# Altium PCB BigBed.PcbDoc
Units mm, origin at the board's own origin, x right, y up, seen from the top; angles counter-clockwise.
Board outline 250 x 270 mm, 2 copper layers (Top Layer, Bottom Layer), stack 1.771 mm thick; 9 components, 6 nets, 29 pads, 314 vias.
Unrouted connection lines stored in the file: 1.
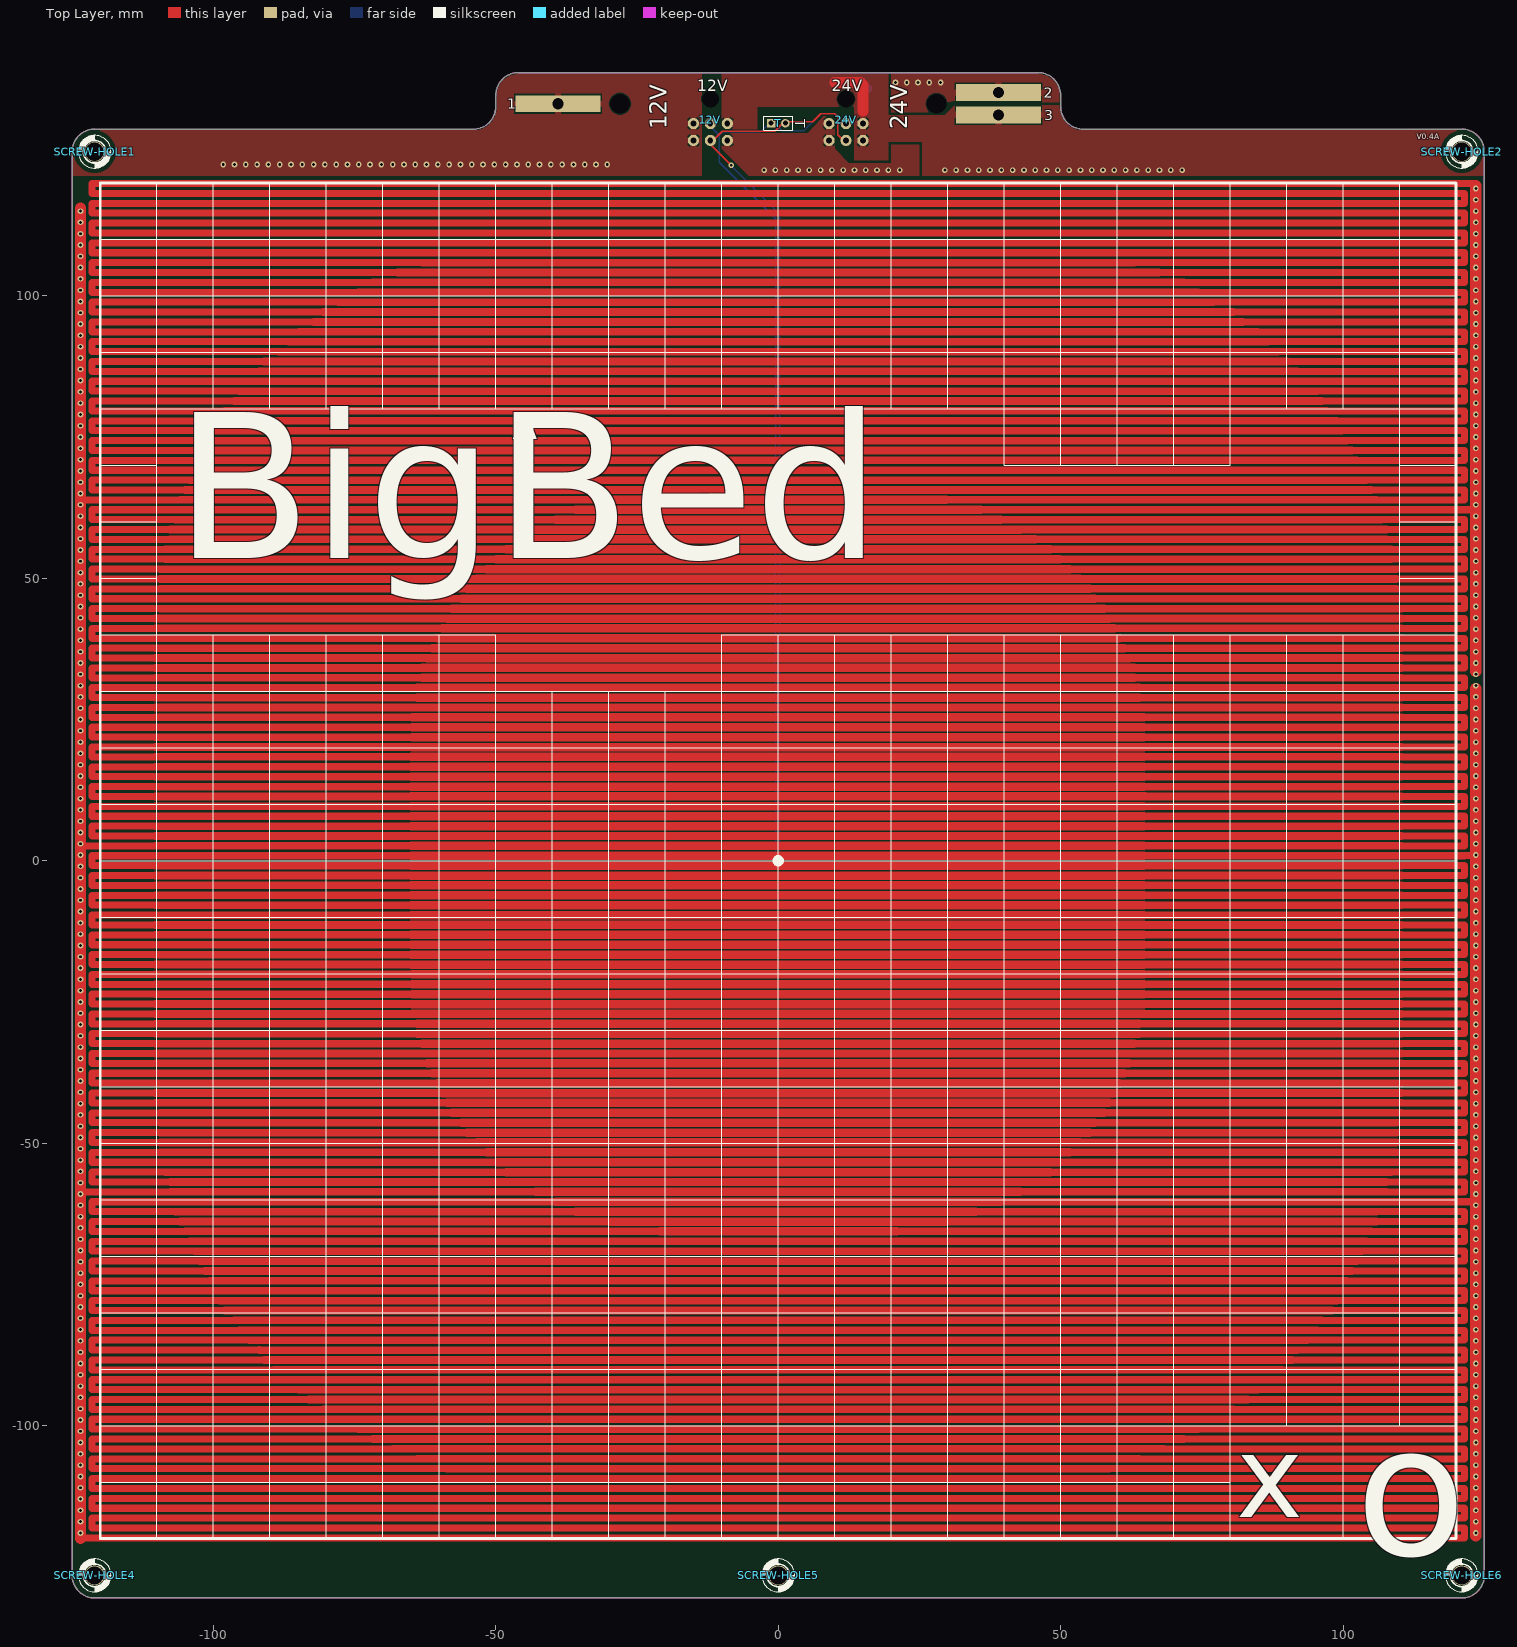
[diagram p0: Top Layer view]
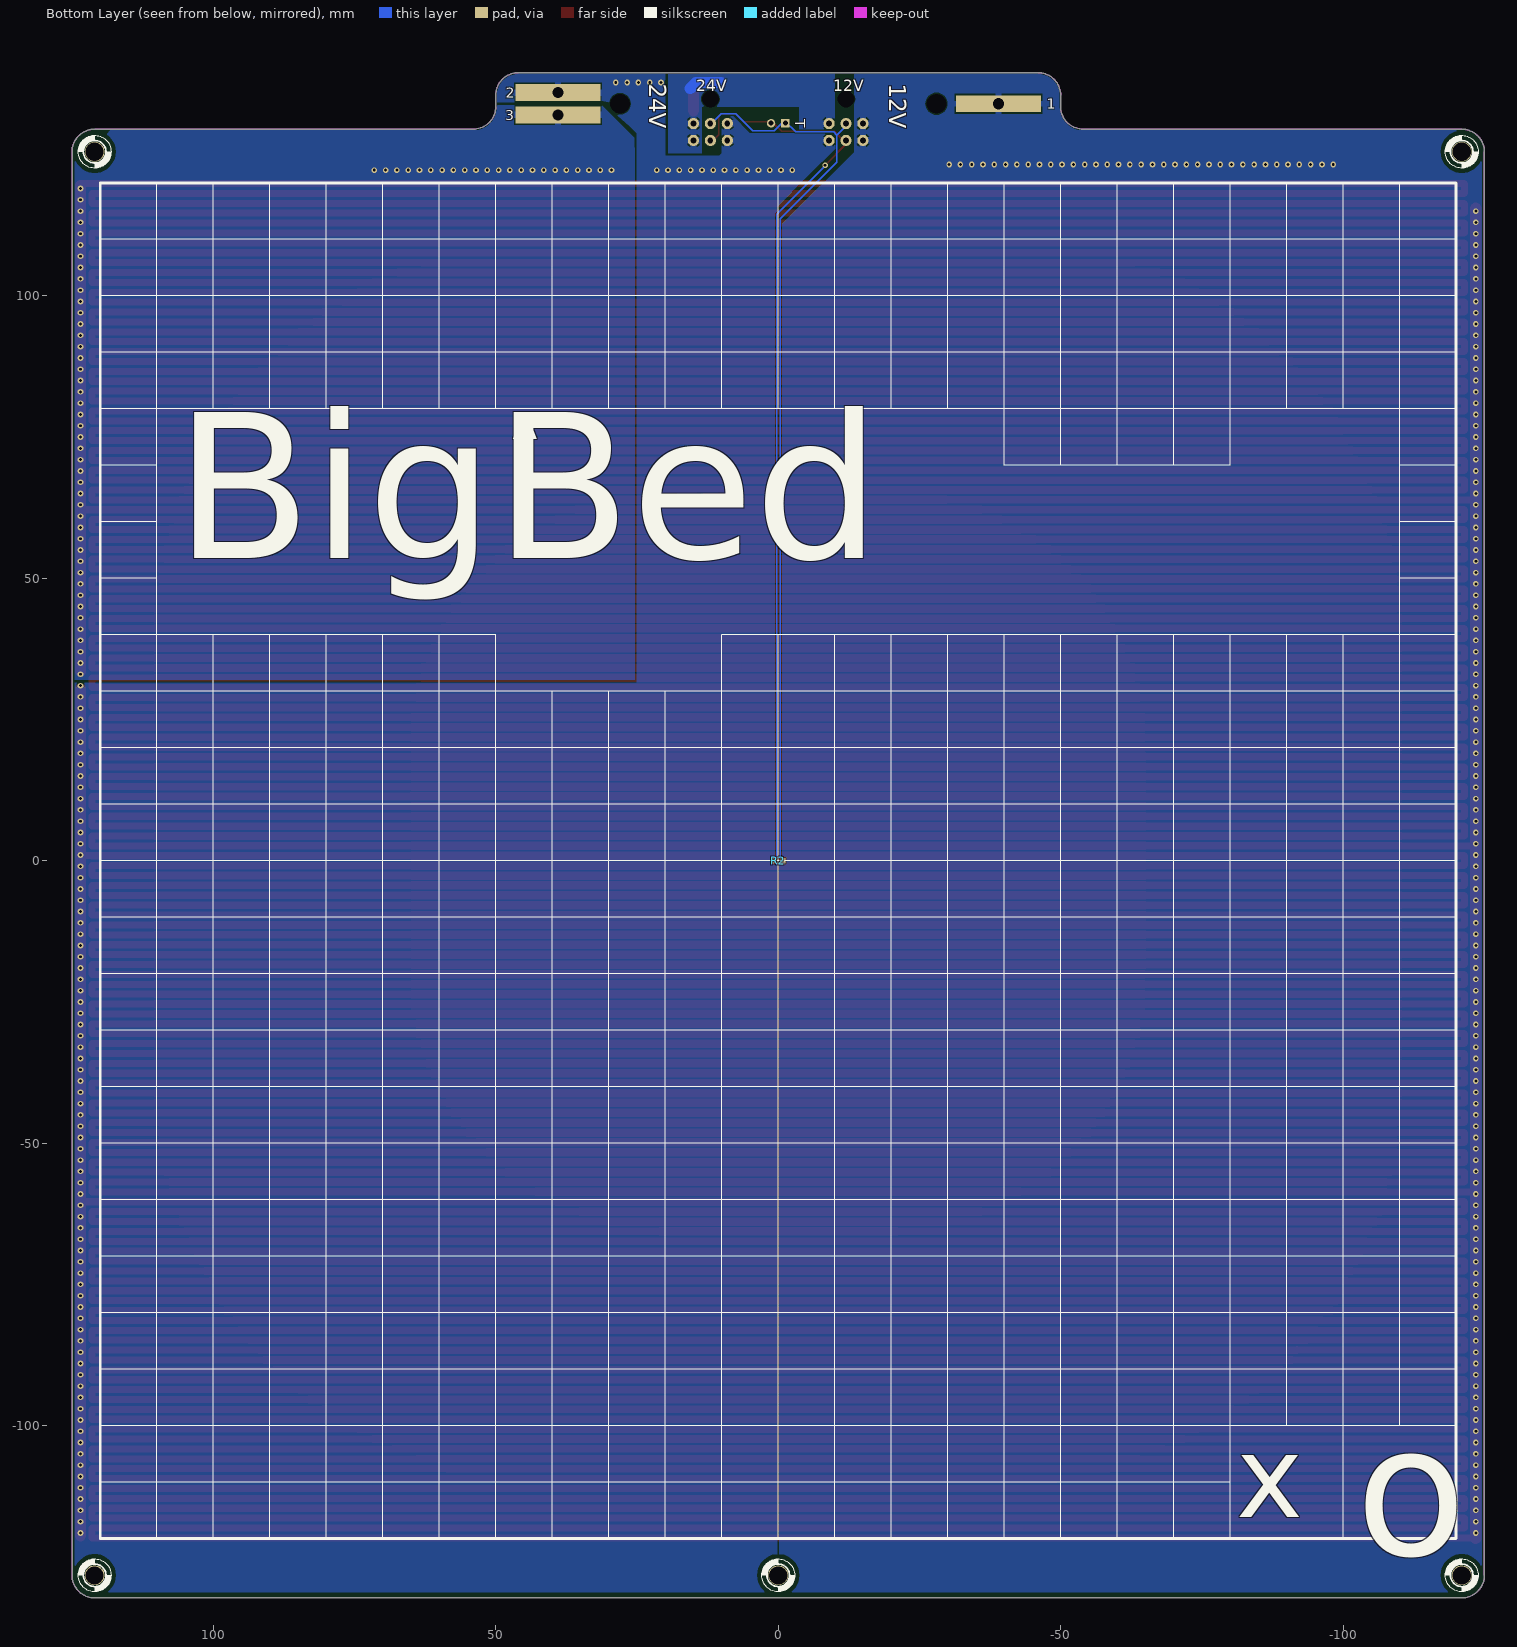
[diagram p1: Bottom Layer view, seen from below]

## Layer stack, top to bottom
Top Solder: solder mask 0.0102, Solder Resist, Dk 3.5
Top Layer: signal copper 0.0356
Dielectric1: dielectric 1.7, FR-4, Dk 4.8
Bottom Layer: signal copper 0.0356
Bottom Solder: solder mask 0.0102, Solder Resist, Dk 3.5

## Board outline
-125,-126.5 ccw(c-121,-126.5) -121,-130.5 121,-130.5 ccw(c121,-126.5) 125,-126.5 125,125.5 ccw(c121,125.5) 121,129.5 54,129.5 cw(c54,133.5) 50,133.5 50,135.5 ccw(c46,135.5) 46,139.5 -46,139.5 ccw(c-46,135.5) -50,135.5 -50,133.5 cw(c-54,133.5) -54,129.5 -121,129.5 ccw(c-121,125.5) -125,125.5

## Design rules (kind name [scope] priority, off if disabled: settings)
Clearance [All] p1: gap=0.2 except(0.4: Poly-Poly)
FabricationTestPointUsage TestPointUsage [All] p1: valid=0 allowmultiple=FALSE
FabricationTestpoint Testpoint [All] p1: side=3 testpointundercomponent=TRUE minsize=1.016 maxsize=2.54 preferedsize=1.524 minholesize=0 maxholesize=1.016 preferedholesize=0.813 testpointgrid=0.025 allowsidetop=TRUE allowsidebottom=TRUE usegrid=TRUE gridtolerance=0
PolygonConnect [All] p1: connectstyle=Relief reliefconductorwidth=1.1 reliefentries=4 polygonreliefangle="90 Angle" airgapwidth=0.25
RoutingVias [All] p1: holewidth=0.711 width=1.27 viastyle="Through Hole" minholewidth=0.711 minwidth=1.27 maxholewidth=0.711 maxwidth=1.27
SilkToSolderMaskClearance SilkscreenOverComponentPads [IsPad] p1: minsilkscreentomaskgap=0.254 clearancetoexposedcopper=TRUE
SolderMaskExpansion [All] p1: expansion=0.102
Width [All] p1: maxlimit=5 minlimit=0.2 preferedwidth=2
27 further rules are at their usual default settings.

## Components (designator, comment, footprint, x,y, rotation, side; value= is the part's Value field where it differs from the comment)
12V "Header 6" "Molex Micro-Fit 6" -12,130.5 r180 top
24V "Header 6" "Molex Micro-Fit 6" 12,130.5 r180 top
R2 "RES_EMPTY_0603" RESC1608X55N 0,0 r0 bottom
SCREW-HOLE1 "Screw Hole" M3-HOLE-2 -121,125.5 r90 top
SCREW-HOLE2 "Screw Hole" M3-HOLE-2 121,125.5 r90 top
SCREW-HOLE4 "Screw Hole" M3-HOLE-2 -121,-126.5 r90 top
SCREW-HOLE5 "Screw Hole" M3-HOLE-2 0,-126.5 r90 top
SCREW-HOLE6 "Screw Hole" M3-HOLE-2 121,-126.5 r90 top
T "Header 2" HDR1X2 -1.27,130.56 r0 top (schematic designator P1)

## Footprints (in the part's own frame and the unit in brackets; to place one, negate y for a bottom-side part, rotate by r counter-clockwise, add the part's x,y. Pads: shape width x height; smd on the part's side, far side on the other; paste and mask are expansions set on the pad)
HDR1X2 [mm] "Connector; Header; 2 Position"
  rect 1.5x1.5 hole 0.9: 1(0,0)
  round 1.5 hole 0.9: 2(2.54,0)
  silkscreen extent -1.27,-1.27 3.81,1.27
M3-HOLE-2 [mm]
  round 3.5 hole 3.2: M3(0,0)
  silkscreen extent -2.9,-2.93 2.9,2.93
"Molex Micro-Fit 6" [mm]
  round 2 hole 1: 1(3,0) 2(0,0) 3(-3,0) 4(3,3) 5(0,3) 6(-3,3)
  round 2 hole 3: 7(0,-4.32)
  body extent -6.57,-8.85 6.58,3.39, height 8.83
RESC1608X55N [mm] "Chip Resistor, Body 1.6x0.8mm, EIA 0603, IPC Medium Density"
  round 0.254 on Mech15: 0(0,0)
  rrect25% 0.9x1 smd: 1(-0.85,0) 2(0.85,0)
  Top Layer pour cut-out: -0.6,0.5 -0.4,0.7 0.4,0.7 0.6,0.5 0.6,-0.5 0.4,-0.7 -0.4,-0.7 -0.6,-0.5
  silkscreen extent -0.15,-0.41 0.15,0.41, body extent -0.87,-0.47 0.88,0.48, height 0.54

## Part data
12V 24V: "Header, 6-Pin"
R2: "Resistor, 08603 SMD, Empty footprint"
T: "Header, 2-Pin"

## Free pads (board coordinates)
  rect 15x3 hole 2: 4(-39,134) 5(39,136) 6(39,132)
  round 1 hole 3.5: 7(28,134) 9(-28,134)

## Via types
v1: diameter 1, hole 0.5, Top Layer to Bottom Layer, tented both sides, 314 vias

## Nets (pads, with @x,y where several pads share a name; then routed paths per layer and width w, separated by ;. In a path a pad name is that pad's centre, name@x,y a point inside that pad or via, vN(x,y) a via of type N, cw(c..) or ccw(c..) an arc to the next point about the centre after c; other vN are vias at no path point)
GND: 12V.3 12V.6 24V.1 24V.3 24V.4 24V.6 pad.5 pad.6 | length 251.5
  Top Layer w2: 10.115,137.75 14.5,137.75 15,137.25 15,132.75 ; v1@123.5,-119.5 v1@123.5,30.5 ; 123.5,33.5 123.5,119.5
  Bottom Layer w2: 10.115,137.75 14.5,137.75 15.56,136.69
  other v1: 123.5,-119 123.5,-117 123.5,-115 123.5,-113 123.5,-111 123.5,-109 123.5,-107 123.5,-105 123.5,-103 123.5,-101 123.5,-99 123.5,-97 123.5,-95 123.5,-93 123.5,-91 123.5,-89 123.5,-87 123.5,-85 123.5,-83 123.5,-81 123.5,-79 123.5,-77 123.5,-75 123.5,-73 123.5,-71 123.5,-69 123.5,-67 123.5,-65 123.5,-63 123.5,-61 123.5,-59 123.5,-57 123.5,-55 123.5,-53 123.5,-51 123.5,-49 123.5,-47 123.5,-45 123.5,-43 123.5,-41 123.5,-39 123.5,-37 123.5,-35 123.5,-33 123.5,-31 123.5,-29 123.5,-27 123.5,-25 123.5,-23 123.5,-21 123.5,-19 123.5,-17 123.5,-15 123.5,-13 123.5,-11 123.5,-9 123.5,-7 123.5,-5 123.5,-3 123.5,-1 123.5,1 123.5,3 123.5,5 123.5,7 123.5,9 123.5,11 123.5,13 123.5,15 123.5,17 123.5,19 123.5,21 123.5,23 123.5,25 123.5,27 123.5,29 123.5,31 123.5,33 123.5,35 123.5,37 123.5,39 123.5,41 123.5,43 123.5,45 123.5,47 123.5,49 123.5,51 123.5,53 123.5,55 123.5,57 123.5,59 123.5,61 123.5,63 123.5,65 123.5,67 123.5,69 123.5,71 123.5,73 123.5,75 123.5,77 123.5,79 123.5,81 123.5,83 123.5,85 123.5,87 123.5,89 123.5,91 123.5,93 123.5,95 123.5,97 123.5,99 123.5,101 123.5,103 123.5,105 123.5,107 123.5,109 123.5,111 123.5,113 123.5,115 123.5,117 123.5,119 -2.5,122.25 -0.5,122.25 1.5,122.25 3.5,122.25 5.5,122.25 7.5,122.25 9.5,122.25 11.5,122.25 13.5,122.25 15.5,122.25 17.5,122.25 19.5,122.25 21.5,122.25 29.5,122.25 31.5,122.25 33.5,122.25 35.5,122.25 37.5,122.25 39.5,122.25 41.5,122.25 43.5,122.25 45.5,122.25 47.5,122.25 49.5,122.25 51.5,122.25 53.5,122.25 55.5,122.25 57.5,122.25 59.5,122.25 61.5,122.25 63.5,122.25 65.5,122.25 67.5,122.25 69.5,122.25 71.5,122.25 20.75,137.75 22.75,137.75 24.75,137.75 26.75,137.75 28.75,137.75
NetD1_A: 
NetD1_K: 
T1: 12V.2 24V.2 R2.1 T.1 | length 161.4
  Bottom Layer w0.25: 12V.2@-12,130 -10.4,128.4 ; R2.1 -0.85,0.15 -0.4,0.6 -0.4,113.65 -10.4,123.65 -10.4,128.4 ; 24V.2@12,130 12,130.3 10.05,132.25 7.55,132.25 4.5,129.2 0.7,129.2 -0.91,130.81 -1.27,130.81 -3.08,129 -9.8,129 -10.4,128.4
T2: 12V.5 24V.5 R2.2 T.2 | length 162.6
  Top Layer w0.25: v1(-8.3,123.1) -12,126.8 -12,127 -9.9,129.1 -0.6,129.1 1.11,130.81 6.11,130.81 7.55,132.25 10.05,132.25 10.5,131.8 10.5,128.5 24V.5@12,127
  Bottom Layer w0.25: v1@-8.35,123.05 0.3,114.4 0.3,0.6 0.85,0.05 R2.2
VCC: 12V.1 12V.4 pad.4
  other v1: -123.5,-119 -123.5,-117 -123.5,-115 -123.5,-113 -123.5,-111 -123.5,-109 -123.5,-107 -123.5,-105 -123.5,-103 -123.5,-101 -123.5,-99 -123.5,-97 -123.5,-95 -123.5,-93 -123.5,-91 -123.5,-89 -123.5,-87 -123.5,-85 -123.5,-83 -123.5,-81 -123.5,-79 -123.5,-77 -123.5,-75 -123.5,-73 -123.5,-71 -123.5,-69 -123.5,-67 -123.5,-65 -123.5,-63 -123.5,-61 -123.5,-59 -123.5,-57 -123.5,-55 -123.5,-53 -123.5,-51 -123.5,-49 -123.5,-47 -123.5,-45 -123.5,-43 -123.5,-41 -123.5,-39 -123.5,-37 -123.5,-35 -123.5,-33 -123.5,-31 -123.5,-29 -123.5,-27 -123.5,-25 -123.5,-23 -123.5,-21 -123.5,-19 -123.5,-17 -123.5,-15 -123.5,-13 -123.5,-11 -123.5,-9 -123.5,-7 -123.5,-5 -123.5,-3 -123.5,-1 -123.5,1 -123.5,3 -123.5,5 -123.5,7 -123.5,9 -123.5,11 -123.5,13 -123.5,15 -123.5,17 -123.5,19 -123.5,21 -123.5,23 -123.5,25 -123.5,27 -123.5,29 -123.5,31 -123.5,33 -123.5,35 -123.5,37 -123.5,39 -123.5,41 -123.5,43 -123.5,45 -123.5,47 -123.5,49 -123.5,51 -123.5,53 -123.5,55 -123.5,57 -123.5,59 -123.5,61 -123.5,63 -123.5,65 -123.5,67 -123.5,69 -123.5,71 -123.5,73 -123.5,75 -123.5,77 -123.5,79 -123.5,81 -123.5,83 -123.5,85 -123.5,87 -123.5,89 -123.5,91 -123.5,93 -123.5,95 -123.5,97 -123.5,99 -123.5,101 -123.5,103 -123.5,105 -123.5,107 -123.5,109 -123.5,111 -123.5,113 -123.5,115 -98.25,123.25 -96.25,123.25 -94.25,123.25 -92.25,123.25 -90.25,123.25 -88.25,123.25 -86.25,123.25 -84.25,123.25 -82.25,123.25 -80.25,123.25 -78.25,123.25 -76.25,123.25 -74.25,123.25 -72.25,123.25 -70.25,123.25 -68.25,123.25 -66.25,123.25 -64.25,123.25 -62.25,123.25 -60.25,123.25 -58.25,123.25 -56.25,123.25 -54.25,123.25 -52.25,123.25 -50.25,123.25 -48.25,123.25 -46.25,123.25 -44.25,123.25 -42.25,123.25 -40.25,123.25 -38.25,123.25 -36.25,123.25 -34.25,123.25 -32.25,123.25 -30.25,123.25
pads on no net: 12V.7 24V.7 R2.0 SCREW-HOLE1.M3 SCREW-HOLE2.M3 SCREW-HOLE4.M3 SCREW-HOLE5.M3 SCREW-HOLE6.M3
copper on no net: | length 59100.1
  Top Layer w1.25: -123.5,-119.875 -116.5,-119.875 ; -122.5,-58.625 -119,-58.625 -107.625,-58.625 ; -122.5,2.625 -119,2.625 -110.25,2.625 ; -122.5,63.875 -120.75,63.875 -119,63.875 -105,63.875 ; -121.625,-119.875 121.5,-119.875 121.5,-118.125 -121.5,-118.125 -121.5,-116.375 121.5,-116.375 121.5,-114.625 -121.5,-114.625 -121.5,-112.875 121.5,-112.875 121.5,-111.125 -121.5,-111.125 -121.5,-109.375 ; -121.5,-58.625 121.5,-58.625 121.5,-56.875 -121.5,-56.875 ; -121.5,2.625 121.5,2.625 121.5,4.375 -121.5,4.375 ; -121.5,63.875 121.5,63.875 121.5,65.625 -121.5,65.625 ; -116.5,-109.375 -121.5,-109.375 ; -116.5,-107.625 -121.5,-107.625 ; -116.5,-105.875 -121.5,-105.875 ; -116.25,-109.375 -49,-109.375 ; -116.25,-107.625 -58.625,-107.625 ; -116.25,-105.875 -63.875,-105.875 ; -110.25,21.875 -121.5,21.875 ; -109.375,-49.875 -121.5,-49.875 ; -109.375,-42.875 -121.5,-42.875 ; -109.375,-41.125 -121.5,-41.125 ; -109.375,-39.375 -121.5,-39.375 ; -109.375,-37.625 -121.5,-37.625 ; -109.375,-35.875 -121.5,-35.875 ; -109.375,-34.125 -121.5,-34.125 ; -109.375,-32.375 -121.5,-32.375 ; -109.375,-28.875 -121.5,-28.875 ; -109.375,-27.125 -121.5,-27.125 ; -109.375,-25.375 -121.5,-25.375 ; -109.375,-23.625 -121.5,-23.625 ; -109.375,-21.875 -121.5,-21.875 ; -109.375,-20.125 -121.5,-20.125 ; -109.375,-18.375 -121.5,-18.375 ; -109.375,-16.625 -121.5,-16.625 ; -109.375,-13.125 -121.5,-13.125 ; -109.375,-9.625 -121.5,-9.625 ; -109.375,-7.875 -121.5,-7.875 ; -109.375,-6.125 -121.5,-6.125 ; -109.375,-4.375 -121.5,-4.375 ; -109.375,-2.625 -121.5,-2.625 ; -109.375,-0.875 -121.5,-0.875 ; -109.375,0.875 -121.5,0.875 ; -109.375,6.125 -121.5,6.125 ; -109.375,13.125 -121.5,13.125 ; -109.375,14.875 -121.5,14.875 ; -109.375,16.625 -121.5,16.625 ; -109.375,18.375 -121.5,18.375 ; -109.375,20.125 -121.5,20.125 ; -109.375,23.625 -121.5,23.625 ; -109.375,25.375 -121.5,25.375 ; -109.375,27.125 -121.5,27.125 ; -109.375,30.625 -121.5,30.625 ; -109.375,32.375 -121.5,32.375 ; -109.375,34.125 -121.5,34.125 ; -109.375,35.875 -121.5,35.875 ; -109.375,37.625 -121.5,37.625 ; -109.375,42.875 -121.5,42.875 ; -108.5,-51.625 -121.5,-51.625 ; -108.5,-44.625 -121.5,-44.625 ; -108.5,-11.375 -121.5,-11.375 ; -108.5,4.375 -121.5,4.375 ; -108.5,7.875 -121.5,7.875 ; -108.5,9.625 -121.5,9.625 ; -108.5,11.375 -121.5,11.375 ; -108.5,28.875 -121.5,28.875 ; -108.5,39.375 -121.5,39.375 ; -108.5,41.125 -121.5,41.125 ; -108.5,44.625 -121.5,44.625 ; -108.5,46.375 -121.5,46.375 ; -108.5,48.125 -121.5,48.125 ; -108.5,49.875 -121.5,49.875 ; -108.5,51.625 -121.5,51.625 ; -107.625,-55.125 -121.5,-55.125 ; -107.625,-53.375 -121.5,-53.375 ; -107.625,-48.125 -121.5,-48.125 ; -107.625,-46.375 -121.5,-46.375 ; -107.625,-30.625 -121.5,-30.625 ; -107.625,-14.875 -121.5,-14.875 ; -107.625,53.375 -121.5,53.375 ; -107.625,55.125 -121.5,55.125 ; -106.75,-56.875 -121.5,-56.875 ; -106.75,56.875 -121.5,56.875 ; -106.75,58.625 -121.5,58.625 ; -105.875,-60.375 -121.5,-60.375 ; -105.875,60.375 -121.5,60.375 ; -105,62.125 -121.5,62.125 ; -104.125,65.625 -121.5,65.625 ; -102.375,-65.625 -121.5,-65.625 ; -101.5,-63.875 -121.5,-63.875 ; -100.625,-70.875 -121.5,-70.875 ; -100.625,-67.375 -121.5,-67.375 ; -99.75,-62.125 -121.5,-62.125 ; -98.875,-74.375 -121.5,-74.375 ; -98.875,-69.125 -121.5,-69.125 ; -98,-72.625 -121.5,-72.625 ; -97.125,-76.125 -121.5,-76.125 ; -93.625,-77.875 -121.5,-77.875 ; -91.875,-79.625 -121.5,-79.625 ; -91,-81.375 -121.5,-81.375 ; -89.25,-83.125 -121.5,-83.125 ; -88.375,-86.625 -121.5,-86.625 ; -87.5,-84.875 -121.5,-84.875 ; -86.625,-90.125 -121.5,-90.125 ; -82.25,-91.875 -121.5,-91.875 ; -79.625,-95.375 -121.5,-95.375 ; -78.75,-93.625 -121.5,-93.625 ; -77.875,-97.125 -121.5,-97.125 ; -77.875,-88.375 -121.5,-88.375 ; -74.375,-98.875 -121.5,-98.875 ; -71.75,-100.625 -121.5,-100.625 ; -70,-102.375 -121.5,-102.375 ; -67.375,-104.125 -121.5,-104.125 ; -49,67.375 -121.5,67.375 ; -49,69.125 -121.5,69.125 -121.5,70.875 -49,70.875 ; -49,72.625 -121.5,72.625 -121.5,74.375 -49,74.375 ; -49,76.125 -121.5,76.125 -121.5,77.875 -49,77.875 ; -49,79.625 -121.5,79.625 -121.5,81.375 -49,81.375 ; -49,83.125 -121.5,83.125 -121.5,84.875 -49,84.875 ; -49,86.625 -121.5,86.625 -121.5,88.375 -49,88.375 ; -49,90.125 -121.5,90.125 -121.5,91.875 -49,91.875 ; -49,93.625 -121.5,93.625 -121.5,95.375 -49,95.375 ; -49,97.125 -121.5,97.125 -121.5,98.875 -49,98.875 ; -49,100.625 -121.5,100.625 -121.5,102.375 -49,102.375 ; -49,104.125 -121.5,104.125 -121.5,105.875 -49,105.875 ; -49,107.625 -121.5,107.625 -121.5,109.375 -49,109.375 ; 49,69.125 121.5,69.125 121.5,67.375 -121.5,67.375 ; 49,70.875 121.5,70.875 121.5,72.625 49,72.625 ; 49,74.375 121.5,74.375 121.5,76.125 49,76.125 ; 49,77.875 121.5,77.875 121.5,79.625 49,79.625 ; 49,81.375 121.5,81.375 121.5,83.125 49,83.125 ; 49,84.875 121.5,84.875 121.5,86.625 49,86.625 ; 49,88.375 121.5,88.375 121.5,90.125 49,90.125 ; 49,91.875 121.5,91.875 121.5,93.625 49,93.625 ; 49,95.375 121.5,95.375 121.5,97.125 49,97.125 ; 49,98.875 121.5,98.875 121.5,100.625 49,100.625 ; 49,102.375 121.5,102.375 121.5,104.125 49,104.125 ; 49,105.875 121.5,105.875 121.5,107.625 49,107.625 ; 49,109.375 121.5,109.375 121.5,111.125 -121.5,111.125 -121.5,112.875 121.5,112.875 121.5,114.625 -121.5,114.625 -121.5,116.375 121.5,116.375 121.5,118.125 -121.5,118.125 -121.5,119.875 121.5,119.875 ; 116.75,-60.375 123.5,-60.375 ; 116.75,0.898 122.9,0.9 ; 116.75,62.125 123,62.125 ; 116.75,119.875 123.375,119.875 ; 121.5,-60.375 -121.5,-60.375 ; 121.5,0.875 -121.5,0.875 ; 121.5,62.125 -121.5,62.125 ; -121.5,-109.375 121.5,-109.375 121.5,-107.625 -121.5,-107.625 ; -121.5,-107.625 -121.5,-105.875 ; -121.5,-105.875 121.5,-105.875 121.5,-104.125 -121.5,-104.125 ; -121.5,-104.125 -121.5,-102.375 ; -121.5,-102.375 121.5,-102.375 121.5,-100.625 -121.5,-100.625 ; -121.5,-100.625 -121.5,-98.875 ; -121.5,-98.875 121.5,-98.875 121.5,-97.125 -121.5,-97.125 ; -121.5,-97.125 -121.5,-95.375 ; -121.5,-95.375 121.5,-95.375 121.5,-93.625 -121.5,-93.625 ; -121.5,-93.625 -121.5,-91.875 ; -121.5,-91.875 121.5,-91.875 121.5,-90.125 -121.5,-90.125 ; -121.5,-90.125 -121.5,-88.375 ; -121.5,-88.375 121.5,-88.375 121.5,-86.625 -121.5,-86.625 ; -121.5,-86.625 -121.5,-84.875 ; -121.5,-84.875 121.5,-84.875 121.5,-83.125 -121.5,-83.125 ; -121.5,-83.125 -121.5,-81.375 ; -121.5,-81.375 121.5,-81.375 121.5,-79.625 -121.5,-79.625 ; -121.5,-79.625 -121.5,-77.875 ; -121.5,-77.875 121.5,-77.875 121.5,-76.125 -121.5,-76.125 ; -121.5,-76.125 -121.5,-74.375 ; -121.5,-74.375 121.5,-74.375 121.5,-72.625 -121.5,-72.625 ; -121.5,-72.625 -121.5,-70.875 ; -121.5,-70.875 121.5,-70.875 121.5,-69.125 -121.5,-69.125 ; -121.5,-69.125 -121.5,-67.375 ; -121.5,-67.375 121.5,-67.375 121.5,-65.625 -121.5,-65.625 ; -121.5,-65.625 -121.5,-63.875 ; -121.5,-63.875 121.5,-63.875 121.5,-62.125 -121.5,-62.125 ; -121.5,-62.125 -121.5,-60.375 ; -121.5,-56.875 -121.5,-55.125 ; -121.5,-55.125 121.5,-55.125 121.5,-53.375 -121.5,-53.375 ; -121.5,-53.375 -121.5,-51.625 ; -121.5,-51.625 121.5,-51.625 121.5,-49.875 -121.5,-49.875 ; -121.5,-49.875 -121.5,-48.125 ; -121.5,-48.125 121.5,-48.125 121.5,-46.375 -121.5,-46.375 ; -121.5,-46.375 -121.5,-44.625 ; -121.5,-44.625 121.5,-44.625 121.5,-42.875 -121.5,-42.875 ; -121.5,-42.875 -121.5,-41.125 ; -121.5,-41.125 121.5,-41.125 121.5,-39.375 -121.5,-39.375 ; -121.5,-39.375 -121.5,-37.625 ; -121.5,-37.625 121.5,-37.625 121.5,-35.875 -121.5,-35.875 ; -121.5,-35.875 -121.5,-34.125 ; -121.5,-34.125 121.5,-34.125 121.5,-32.375 -121.5,-32.375 ; -121.5,-32.375 -121.5,-30.625 ; -121.5,-30.625 121.5,-30.625 121.5,-28.875 -121.5,-28.875 ; -121.5,-28.875 -121.5,-27.125 ; -121.5,-27.125 121.5,-27.125 121.5,-25.375 -121.5,-25.375 ; -121.5,-25.375 -121.5,-23.625 ; -121.5,-23.625 121.5,-23.625 121.5,-21.875 -121.5,-21.875 ; -121.5,-21.875 -121.5,-20.125 ; -121.5,-20.125 121.5,-20.125 121.5,-18.375 -121.5,-18.375 ; -121.5,-18.375 -121.5,-16.625 ; -121.5,-16.625 121.5,-16.625 121.5,-14.875 -121.5,-14.875 ; -121.5,-14.875 -121.5,-13.125 ; -121.5,-13.125 121.5,-13.125 121.5,-11.375 -121.5,-11.375 ; -121.5,-11.375 -121.5,-9.625 ; -121.5,-9.625 121.5,-9.625 121.5,-7.875 -121.5,-7.875 ; -121.5,-7.875 -121.5,-6.125 ; -121.5,-6.125 121.5,-6.125 121.5,-4.375 -121.5,-4.375 ; -121.5,-4.375 -121.5,-2.625 ; -121.5,-2.625 121.5,-2.625 121.5,-0.875 -121.5,-0.875 ; -121.5,-0.875 -121.5,0.875 ; -121.5,4.375 -121.5,6.125 ; -121.5,6.125 121.5,6.125 121.5,7.875 -121.5,7.875 ; -121.5,7.875 -121.5,9.625 ; -121.5,9.625 121.5,9.625 121.5,11.375 -121.5,11.375 ; -121.5,11.375 -121.5,13.125 ; -121.5,13.125 121.5,13.125 121.5,14.875 -121.5,14.875 ; -121.5,14.875 -121.5,16.625 ; -121.5,16.625 121.5,16.625 121.5,18.375 -121.5,18.375 ; -121.5,18.375 -121.5,20.125 ; -121.5,20.125 121.5,20.125 121.5,21.875 -121.5,21.875 ; -121.5,21.875 -121.5,23.625 ; -121.5,23.625 121.5,23.625 121.5,25.375 -121.5,25.375 ; -121.5,25.375 -121.5,27.125 ; -121.5,27.125 121.5,27.125 121.5,28.875 -121.5,28.875 ; -121.5,28.875 -121.5,30.625 ; -121.5,30.625 121.5,30.625 121.5,32.375 -121.5,32.375 ; -121.5,32.375 -121.5,34.125 ; -121.5,34.125 121.5,34.125 121.5,35.875 -121.5,35.875 ; -121.5,35.875 -121.5,37.625 ; -121.5,37.625 121.5,37.625 121.5,39.375 -121.5,39.375 ; -121.5,39.375 -121.5,41.125 ; -121.5,41.125 121.5,41.125 121.5,42.875 -121.5,42.875 ; -121.5,42.875 -121.5,44.625 ; -121.5,44.625 121.5,44.625 121.5,46.375 -121.5,46.375 ; -121.5,46.375 -121.5,48.125 ; -121.5,48.125 121.5,48.125 121.5,49.875 -121.5,49.875 ; -121.5,49.875 -121.5,51.625 ; -121.5,51.625 121.5,51.625 121.5,53.375 -121.5,53.375 ; -121.5,53.375 -121.5,55.125 ; -121.5,55.125 121.5,55.125 121.5,56.875 -121.5,56.875 ; -121.5,56.875 -121.5,58.625 ; -121.5,58.625 121.5,58.625 121.5,60.375 -121.5,60.375 ; -121.5,60.375 -121.5,62.125 ; -121.5,65.625 -121.5,67.375
  Top Layer w1.35: -110.25,-42.875 -58.625,-42.875 ; -110.25,-41.125 -59.5,-41.125 ; -110.25,-39.375 -60.375,-39.375 ; -110.25,-37.625 -61.25,-37.625 ; -110.25,-35.875 -62.125,-35.875 ; -110.25,-34.125 -63,-34.125 ; -110.25,-32.375 -63,-32.375 ; -110.25,-30.625 -63.875,-30.625 ; -110.25,-28.875 -63.875,-28.875 ; -110.25,-27.125 -64.75,-27.125 ; -110.25,-25.375 -64.75,-25.375 ; -110.25,-23.625 -64.75,-23.625 ; -110.25,-21.875 -64.75,-21.875 ; -110.25,-20.125 -64.75,-20.125 ; -110.25,-18.375 -61.25,-18.375 ; -110.25,-16.625 -61.25,-16.625 ; -110.25,-14.875 -61.25,-14.875 ; -110.25,-13.125 -65,-13.125 ; -110.25,-11.375 -61.25,-11.375 ; -110.25,-9.625 -65,-9.625 ; -110.25,-7.875 -61.25,-7.875 ; -110.25,-6.125 -61.25,-6.125 ; -110.25,-4.375 -61.25,-4.375 ; -110.25,-2.625 -61.25,-2.625 ; -110.25,-0.875 -61.25,-0.875 ; -110.25,0.875 -65,0.875 ; -110.25,2.625 -65,2.625 ; -110.25,4.375 -65,4.375 ; -110.25,6.125 -65,6.125 ; -110.25,7.875 -65,7.875 ; -110.25,9.625 -61.25,9.625 ; -110.25,11.375 -61.25,11.375 ; -110.25,13.125 -65,13.125 ; -110.25,14.875 -65,14.875 ; -110.25,16.625 -65,16.625 ; -110.25,18.375 -61.25,18.375 ; -110.25,20.125 -64.75,20.125 ; -110.25,21.875 -64.75,21.875 ; -110.25,23.625 -64.75,23.625 ; -110.25,25.375 -64.75,25.375 ; -110.25,27.125 -64.75,27.125 ; -110.25,28.875 -63.875,28.875 ; -110.25,30.625 -63.875,30.625 ; -110.25,32.375 -63,32.375 ; -110.25,34.125 -63,34.125 ; -110.25,35.875 -62.125,35.875 ; -110.25,37.625 -61.25,37.625 ; -110.25,39.375 -60.375,39.375 ; -110.25,41.125 -59.5,41.125 ; -110.25,42.875 -58.625,42.875 ; -109.375,-51.625 -51.625,-51.625 ; -109.375,-49.875 -53.375,-49.875 ; -109.375,-48.125 -55.125,-48.125 ; -109.375,-46.375 -56,-46.375 ; -109.375,-44.625 -57.75,-44.625 ; -109.375,44.625 -57.75,44.625 ; -109.375,46.375 -56,46.375 ; -109.375,48.125 -55.125,48.125 ; -109.375,49.875 -53.375,49.875 ; -109.375,51.625 -51.625,51.625 ; -108.5,-55.125 -48.125,-55.125 ; -108.5,-53.375 -49.875,-53.375 ; -108.5,53.375 -49.875,53.375 ; -108.5,55.125 -48.125,55.125 ; -107.625,-58.625 -42.875,-58.625 ; -107.625,-56.875 -45.5,-56.875 ; -107.625,56.875 -45.5,56.875 ; -107.625,58.625 -42.875,58.625 ; -106.75,-62.125 -35.875,-62.125 ; -106.75,-60.375 -39.375,-60.375 ; -106.75,60.375 -39.375,60.375 ; -106.75,62.125 -35.875,62.125 ; -105.875,-63.875 -29.75,-63.875 ; -105.875,63.875 -29.75,63.875 ; -105,-65.625 -21,-65.625 ; -105,65.625 -21,65.625 ; -104.125,-67.375 104.125,-67.375 ; -104.125,67.375 104.125,67.375 ; -103.25,-69.125 103.25,-69.125 ; -103.25,69.125 103.25,69.125 ; -102.375,-70.875 102.375,-70.875 ; -102.375,70.875 102.375,70.875 ; -101.5,-72.625 101.5,-72.625 ; -101.5,72.625 101.5,72.625 ; -100.625,-74.375 100.625,-74.375 ; -100.625,74.375 100.625,74.375 ; -99.75,-76.125 99.75,-76.125 ; -99.75,76.125 99.75,76.125 ; -98.875,-77.875 98.875,-77.875 ; -98.875,77.875 98.875,77.875 ; -98,-79.625 98,-79.625 ; -98,79.625 97.125,79.625 ; -96.25,-81.375 96.25,-81.375 ; -96.25,81.375 96.25,81.375 ; -95.375,-83.125 95.375,-83.125 ; -95.375,83.125 95.375,83.125 ; -93.625,-84.875 93.625,-84.875 ; -93.625,84.875 93.625,84.875 ; -91.875,-86.625 91.875,-86.625 ; -91.875,86.625 91.875,86.625 ; -91,-88.375 91,-88.375 ; -91,88.375 90.125,88.375 ; -89.25,-90.125 89.25,-90.125 ; -88.375,90.125 88.375,90.125 ; -86.625,-91.875 86.625,-91.875 ; -86.625,91.875 86.625,91.875 ; -84.875,-93.625 84.875,-93.625 ; -84.875,93.625 84.875,93.625 ; -83.125,-95.375 83.125,-95.375 ; -82.25,95.375 82.25,95.375 ; -80.5,-97.125 80.5,-97.125 ; -80.5,97.125 80.5,97.125 ; -77.875,-98.875 77.875,-98.875 ; -77.875,98.875 77,98.875 ; -74.375,-100.625 74.375,-100.625 ; -74.375,100.625 74.375,100.625 ; -71.75,-102.375 71.75,-102.375 ; -71.75,102.375 71.75,102.375 ; -68.25,-104.125 68.25,-104.125 ; -67.375,104.125 67.375,104.125 ; -63.875,-105.875 63.875,-105.875 ; -63,105.875 63,105.875 ; -58.625,-107.625 58.625,-107.625 ; -57.75,107.625 56.875,107.625 ; -49,-109.375 49,-109.375 ; -49,109.375 49,109.375 ; 20.125,-65.625 105,-65.625 ; 21,65.625 105,65.625 ; 29.75,-63.875 105.875,-63.875 ; 29.75,63.875 105.875,63.875 ; 35,-62.125 105.875,-62.125 ; 35.875,62.125 106.75,62.125 ; 39.375,-60.375 106.75,-60.375 ; 39.375,60.375 106.75,60.375 ; 42.875,-58.625 107.625,-58.625 ; 42.875,58.625 107.625,58.625 ; 45.5,-56.875 107.625,-56.875 ; 45.5,56.875 107.625,56.875 ; 48.125,-55.125 108.5,-55.125 ; 48.125,55.125 108.5,55.125 ; 49.875,-53.375 108.5,-53.375 ; 49.875,53.375 108.5,53.375 ; 51.625,-51.625 109.375,-51.625 ; 51.625,51.625 109.375,51.625 ; 53.375,-49.875 109.375,-49.875 ; 53.375,49.875 109.375,49.875 ; 55.125,-48.125 109.375,-48.125 ; 55.125,48.125 109.375,48.125 ; 56,-46.375 109.375,-46.375 ; 56,46.375 109.375,46.375 ; 57.75,-44.625 110.25,-44.625 ; 57.75,44.625 110.25,44.625 ; 58.625,-42.875 110.25,-42.875 ; 58.625,42.875 110.25,42.875 ; 59.5,-41.125 110.25,-41.125 ; 59.5,41.125 110.25,41.125 ; 60.375,-39.375 110.25,-39.375 ; 60.375,39.375 110.25,39.375 ; 61.25,-37.625 110.25,-37.625 ; 61.25,-18.375 110.25,-18.375 ; 61.25,-16.625 110.25,-16.625 ; 61.25,-14.875 110.25,-14.875 ; 61.25,-11.375 110.25,-11.375 ; 61.25,-7.875 110.25,-7.875 ; 61.25,-6.125 110.25,-6.125 ; 61.25,-4.375 110.25,-4.375 ; 61.25,-2.625 110.25,-2.625 ; 61.25,-0.875 110.25,-0.875 ; 61.25,9.625 110.25,9.625 ; 61.25,11.375 110.25,11.375 ; 61.25,18.375 110.25,18.375 ; 61.25,37.625 110.25,37.625 ; 62.125,-35.875 110.25,-35.875 ; 62.125,35.875 110.25,35.875 ; 63,-34.125 110.25,-34.125 ; 63,-32.375 110.25,-32.375 ; 63,32.375 110.25,32.375 ; 63,34.125 110.25,34.125 ; 63.875,-30.625 110.25,-30.625 ; 63.875,-28.875 110.25,-28.875 ; 63.875,28.875 110.25,28.875 ; 63.875,30.625 110.25,30.625 ; 64.75,-27.125 110.25,-27.125 ; 64.75,-25.375 110.25,-25.375 ; 64.75,-23.625 110.25,-23.625 ; 64.75,-21.875 110.25,-21.875 ; 64.75,-20.125 110.25,-20.125 ; 64.75,-13.125 110.25,-13.125 ; 64.75,-9.625 110.25,-9.625 ; 64.75,0.875 110.25,0.875 ; 64.75,2.625 110.25,2.625 ; 64.75,4.375 110.25,4.375 ; 64.75,6.125 110.25,6.125 ; 64.75,7.875 110.25,7.875 ; 64.75,13.125 110.25,13.125 ; 64.75,14.875 110.25,14.875 ; 64.75,16.625 110.25,16.625 ; 64.75,20.125 110.25,20.125 ; 64.75,21.875 110.25,21.875 ; 64.75,23.625 110.25,23.625 ; 64.75,25.375 110.25,25.375 ; 64.75,27.125 110.25,27.125
  Top Layer w1.5: -65,-18.375 64.75,-18.375 ; -65,-16.625 64.75,-16.625 ; -65,-14.875 64.75,-14.875 ; -65,-13.125 64.75,-13.125 ; -65,-11.375 64.75,-11.375 ; -65,-9.625 64.75,-9.625 ; -65,-7.875 64.75,-7.875 ; -65,-6.125 64.75,-6.125 ; -65,-4.375 64.75,-4.375 ; -65,-2.625 64.75,-2.625 ; -65,-0.875 64.75,-0.875 ; -65,0.875 64.75,0.875 ; -65,2.625 64.75,2.625 ; -65,4.375 64.75,4.375 ; -65,6.125 64.75,6.125 ; -65,7.875 64.75,7.875 ; -65,9.625 64.75,9.625 ; -65,11.375 65,11.375 ; -65,13.125 64.75,13.125 ; -65,14.875 64.75,14.875 ; -65,16.625 64.75,16.625 ; -65,18.375 64.75,18.375 ; -64.75,-27.125 64.75,-27.125 ; -64.75,-25.375 64.75,-25.375 ; -64.75,-23.625 64.75,-23.625 ; -64.75,-21.875 64.75,-21.875 ; -64.75,-20.125 64.75,-20.125 ; -64.75,20.125 64.75,20.125 ; -64.75,21.875 64.75,21.875 ; -64.75,23.625 64.75,23.625 ; -64.75,25.375 64.75,25.375 ; -64.75,27.125 64.75,27.125 ; -63.875,-30.625 63.875,-30.625 ; -63.875,-28.875 63.875,-28.875 ; -63.875,28.875 63.875,28.875 ; -63.875,30.625 63.875,30.625 ; -63,-34.125 63,-34.125 ; -63,-32.375 63,-32.375 ; -63,32.375 63,32.375 ; -63,34.125 63,34.125 ; -62.125,-35.875 62.125,-35.875 ; -62.125,35.875 62.125,35.875 ; -61.25,-37.625 61.25,-37.625 ; -61.25,37.625 61.25,37.625 ; -60.375,-39.375 60.375,-39.375 ; -60.375,39.375 60.375,39.375 ; -59.5,-41.125 59.5,-41.125 ; -59.5,41.125 59.5,41.125 ; -58.625,-42.875 58.625,-42.875 ; -58.625,42.875 58.625,42.875 ; -57.75,-44.625 57.75,-44.625 ; -57.75,44.625 57.75,44.625 ; -56,-46.375 56,-46.375 ; -56,46.375 56,46.375 ; -55.125,-48.125 55.125,-48.125 ; -55.125,48.125 55.125,48.125 ; -53.375,-49.875 53.375,-49.875 ; -53.375,49.875 53.375,49.875 ; -51.625,-51.625 51.625,-51.625 ; -51.625,51.625 51.625,51.625 ; -49.875,-53.375 49.875,-53.375 ; -49.875,53.375 49.875,53.375 ; -48.125,-55.125 48.125,-55.125 ; -48.125,55.125 48.125,55.125 ; -45.5,-56.875 45.5,-56.875 ; -45.5,56.875 45.5,56.875 ; -42.875,-58.625 42.875,-58.625 ; -42.875,58.625 42.875,58.625 ; -39.375,-60.375 39.375,-60.375 ; -39.375,60.375 39.375,60.375 ; -35.875,-62.125 35,-62.125 ; -35.875,62.125 35.875,62.125 ; -29.75,-63.875 29.75,-63.875 ; -29.75,63.875 29.75,63.875 ; -21,-65.625 21,-65.625 ; -21,65.625 21,65.625
  Top Layer w2: -123.5,-120 -123.5,115.5

## Polygon pours and split planes (outlines as drawn)
GND on Bottom Layer "Bottom Layer-GND" (solid, remove dead copper, pour order 32): 25.4,124.4 25.4,32 124.5,32 124.5,127 123,128.5 29.5,128.5
GND on Bottom Layer "Bottom Layer-GND" (solid, remove dead copper, pour order 31): 123,-129.5 124.5,-128 124.5,31.5 25,31.5 25,124.8 -8.8,124.8 -5,121 0.2,115.8 0.2,-129.5
VCC on Bottom Layer "Bottom Layer-GND" (solid, remove dead copper, pour order 30): -124.5,127.5 -112.5,139.5 -27.5,139.5 -0.2,112.2 -0.2,-129.5 -122.938,-129.5 -124.5,-128.111
VCC on Bottom Layer "Bottom Layer-GND" (solid, pour order 34): -27.271,139.271 -13.521,139.271 -13.5,139.25 -13.5,124.25 -14.5,124.25 -27.25,137
GND on Bottom Layer "Bottom Layer-GND" (solid, remove dead copper, pour order 36): -10.4,129 -10.4,126.325 -7.825,123.75 10.75,123.75 10.75,124.5 10.5,124.75 10,125.25 10,131.75 8,131.75 5,128.75 4.75,128.75 -9.25,128.75
GND on Bottom Layer "Bottom Layer-GND" (solid, remove dead copper, pour order 35): -10.25,128.75 -10.25,126.25 -9.75,125.75 -5.25,121.25 -5,121 25,121 25,128.75 26.25,130 31.25,134.5 30,134.25 50.25,134.25 50.25,140 20,140 20,123.5 10,123.5 10,131.5 9.75,131.75 8,131.75 7.5,131.25 5.25,128.75
GND on Bottom Layer "Bottom Layer-GND" (solid, remove dead copper, pour order 39): 25.4,124.4 25.5,128 26.25,128.75 31.25,133.75 49.75,133.75 113.5,134 119,128.5 113.25,122.75 85.75,122.75
GND on Bottom Layer "Bottom Layer-GND" (solid, remove dead copper, pour order 42): 19.5,125.25 13.5,125.25 13.5,139.25 19.5,139.25
GND on Bottom Layer "Bottom Layer-GND" (solid, remove dead copper, pour order 44): -10,139.75 -10,129.5 -4,129.5 -3.75,129.5 -3.75,133.5 14,133.5 14,139.25 13.5,139.75
VCC on Top Layer "Bottom Layer-GND" (solid, remove dead copper, pour order 33): -126,139.5 -126,121.25 -13.5,121.25 -13.5,139.5
GND on Top Layer "Bottom Layer-GND" (solid, remove dead copper, pour order 38): 20,123.5 20,126.75 25,126.75 25,121.25 -5.25,121.25 -9.75,125.75 -10,126 -10,128.75 5.25,128.75 7.5,131.25 8,131.75 9.75,131.75 10,131.5 10,126 12.5,123.5
GND on Top Layer "Bottom Layer-GND" (solid, remove dead copper, pour order 40): 118.75,133.75 118.75,131.25 126.25,123.75 126.25,121.25 25.5,121.25 25.5,128 31.25,133.75 50.25,133.75
GND on Top Layer "Bottom Layer-GND" (solid, remove dead copper, pour order 37): 20,140 20,132.5 29.167,132.5 30.99,134.25 30,134.25 31.25,134.5 30.99,134.25 50.25,134.25 50.25,140
GND on Top Layer "Bottom Layer-GND" (solid, remove dead copper, pour order 41): 29.75,132 19.5,132 19.5,139.25 13.5,139.25 13.5,124 19.5,124 19.5,127.25 29.75,127.25
GND on Top Layer "Bottom Layer-GND" (solid, remove dead copper, pour order 43): -10,139.75 -10,129.5 -4,129.5 -3.75,129.5 -3.75,133.5 14,133.5 14,139.25 13.5,139.75

## Keep-outs
Keep-Out Layer:
  lines w0.05: -125,-126.5 ccw(c-121,-126.5) -121,-130.5 121,-130.5 ccw(c121,-126.5) 125,-126.5 125,125.5 ccw(c121,125.5) 121,129.5 54,129.5 cw(c54,133.5) 50,133.5 50,135.5 ccw(c46,135.5) 46,139.5 0,139.5 -46,139.5 ccw(c-46,135.5) -50,135.5 -50,133.5 cw(c-54,133.5) -54,129.5 -121,129.5 ccw(c-121,125.5) -125,125.5 -125,-126.5

## Silkscreen, mask and mechanical layers (free items; w line width, h text height)
Top Overlay:
  circle w1: c0,0 r0.5
  lines w0.2: -120,-110 80,-110 ; -120,-100 120,-100 ; -120,-90 120,-90 ; -120,-80 120,-80 ; -120,-70 120,-70 ; -120,-60 120,-60 ; -120,-50 120,-50 ; -120,-40 120,-40 ; -120,-30 120,-30 ; -120,-20 120,-20 ; -120,-10 120,-10 ; -120,0 120,0 ; -120,10 120,10 ; -120,20 120,20 ; -120,30 120,30 ; -120,40 -50,40 -50,-120 ; -120,50 -110,50 ; -120,60 -110,60 ; -120,70 -110,70 ; -120,80 120,80 ; -120,90 120,90 ; -120,100 120,100 ; -120,110 120,110 ; -110,-120 -110,120 ; -100,-120 -100,40 ; -100,80 -100,120 ; -90,-120 -90,40 ; -90,80 -90,120 ; -80,-120 -80,40 ; -80,80 -80,120 ; -70,-120 -70,40 ; -70,80 -70,120 ; -60,-120 -60,40 ; -60,80 -60,120 ; -50,80 -50,120 ; -40,-120 -40,30 ; -40,80 -40,120 ; -30,-120 -30,30 ; -30,80 -30,120 ; -20,-120 -20,30 ; -20,80 -20,120 ; -10,-120 -10,40 120,40 ; -10,80 -10,120 ; 0,-120 0,40 ; 0,80 0,120 ; 10,-120 10,40 ; 10,80 10,120 ; 20,-120 20,40 ; 20,80 20,120 ; 30,-120 30,40 ; 30,80 30,120 ; 40,-120 40,40 ; 40,120 40,70 80,70 80,120 ; 50,-120 50,40 ; 50,70 50,120 ; 60,-120 60,40 ; 60,70 60,120 ; 70,-120 70,40 ; 70,70 70,120 ; 80,-120 80,40 ; 90,-100 90,40 ; 90,80 90,120 ; 100,-120 100,40 ; 100,80 100,120 ; 110,-100 110,120 ; 110,50 120,50 ; 110,60 120,60 ; 110,70 120,70
  lines w0.5: -120,-120 120,-120 120,120 -120,120 -120,-120
  text "12V" at -14.3,136.2 h2
  text "24V" at 9.5,136.2 h2
  text "2" at 47,135.1 h1.8
  text "1" at -48,133.1 h1.8
  text "T" at 3,131.25 h1.8 r270
  text "3" at 47.1,131.1 h1.8
  text "12V" at -19.7,129.5 h3 r90
  text "24V" at 22.8,129.5 h3 r90
  text "V0.4A" at 113,127.75 h1
  text "A" at -47,73 h8
  text "BigBed" at -106.81,42.46 h58
  text "x" at 81.1,-121 h25
  text "o" at 102.2,-130.6 h40
Bottom Overlay:
  lines w0.2: -120,-100 120,-100 ; -120,-90 120,-90 ; -120,-80 120,-80 ; -120,-70 120,-70 ; -120,-60 120,-60 ; -120,-50 120,-50 ; -120,-40 120,-40 ; -120,-30 120,-30 ; -120,-20 120,-20 ; -120,-10 120,-10 ; -120,0 120,0 ; -120,10 120,10 ; -120,20 120,20 ; -120,30 120,30 ; -120,40 10,40 10,-120 ; -120,50 -110,50 ; -120,60 -110,60 ; -120,70 -110,70 ; -120,80 120,80 ; -120,90 120,90 ; -120,100 120,100 ; -120,110 120,110 ; -110,-100 -110,120 ; -100,-120 -100,40 ; -100,80 -100,120 ; -90,-100 -90,40 ; -90,80 -90,120 ; -80,-120 -80,40 ; -80,-110 120,-110 ; -80,120 -80,70 -40,70 -40,120 ; -70,-120 -70,40 ; -70,70 -70,120 ; -60,-120 -60,40 ; -60,70 -60,120 ; -50,-120 -50,40 ; -50,70 -50,120 ; -40,-120 -40,40 ; -30,-120 -30,40 ; -30,80 -30,120 ; -20,-120 -20,40 ; -20,80 -20,120 ; -10,-120 -10,40 ; -10,80 -10,120 ; 0,-120 0,40 ; 0,80 0,120 ; 10,80 10,120 ; 20,-120 20,30 ; 20,80 20,120 ; 30,-120 30,30 ; 30,80 30,120 ; 40,-120 40,30 ; 40,80 40,120 ; 50,-120 50,40 120,40 ; 50,80 50,120 ; 60,-120 60,40 ; 60,80 60,120 ; 70,-120 70,40 ; 70,80 70,120 ; 80,-120 80,40 ; 80,80 80,120 ; 90,-120 90,40 ; 90,80 90,120 ; 100,-120 100,40 ; 100,80 100,120 ; 110,-120 110,120 ; 110,50 120,50 ; 110,60 120,60 ; 110,70 120,70
  lines w0.5: -120,-120 120,-120 120,120 -120,120 -120,-120
  text "12V" at -19.7,137.5 h3 r90
  text "24V" at 22.8,137.5 h3 r90
  text "12V" at -9.7,136.2 h2
  text "24V" at 14.5,136.2 h2
  text "2" at 48.2,135.1 h1.8
  text "1" at -47.5,133.1 h1.8
  text "T" at -3,131.25 h1.8 r90
  text "3" at 48.3,131.1 h1.8
  text "A" at 47,73 h8
  text "BigBed" at 106.81,42.46 h58
  text "x" at -81.1,-121 h25
  text "o" at -102.2,-130.6 h40
Mechanical 1:
  lines w0.2: 0,0 0,139.7 ; -120,-120 -120,120 120,120 120,-120 -120,-120 ; -60,-60 -60,60 60,60 60,-60 -60,-60
Mechanical 2:
  lines w1: -110,-40 ccw(c-40,-40) -40,-110 40,-110 ccw(c40,-40) 110,-40 110,40 ccw(c40,40) 40,110 -40,110 ccw(c-40,40) -110,40 -110,-40 ; -65,-20 ccw(c-20,-20) -20,-65 20,-65 ccw(c20,-20) 65,-20 65,20 ccw(c20,20) 20,65 -20,65 ccw(c-20,20) -65,20 -65,-20
Mechanical 15:
  lines w0.2: -122.25,-117.25 119.25,-117.25 ; -122,117.25 119.5,117.25 ; -116.5,-121 -116.5,120.5 ; 116.5,-121 116.5,120.5
Mechanical 16:
  circle w0.15: c-121,125.5 r3.5
  circle w0.15: c-121,-126.5 r3.5
  circle w0.15: c0,-126.5 r3.5
  circle w0.15: c121,-126.5 r3.5
  circle w0.15: c121,125.5 r3.5
  lines w0.127: -195,-74.515 -189.92,-74.515 ; -195,-4.03 -189.92,-4.03 ; -195,66.455 -189.92,66.455 ; -195,136.94 -195,-145 198.7,-145 198.7,136.94 ; -189.92,-139.92 -189.92,131.86 ; 193.62,-139.92 193.62,131.86
  text "A" at -193.095,99.526 h1.78
  text "A" at 195.525,99.526 h1.78
  text "B" at -193.095,28.914 h1.78
  text "C" at -193.095,-41.698 h1.78
  text "D" at -193.095,-111.802 h1.78
  text "Based on designs by Josef Prusa, RepRap Discount, and others. See reprap.org/wiki/PCB_Heatbed" at -151.5,-113 h2.5 r90
  text "Based on designs by Josef Prusa, RepRap Discount, and others. See reprap.org/wiki/PCB_Heatbed" at 151.5,-113 h2.5 r270
  text "Aus3D BigBed V0.1A, design by Chris Barr. See github.com/Aus3D/BigBed for information and source" at -153.5,-117 h2.5 r270
  text "Aus3D BigBed V0.1A, design by Chris Barr. See github.com/Aus3D/BigBed for information and source" at 153.5,-117 h2.5 r90

## Dimensions
-125,125.5 to 125,125.5 on Mechanical 13
121,125.5 to 121,-126.5 on Mechanical 13
121,125.5 to -121,125.5 on Mechanical 13
-46,139.5 to -121,-130.5 on Mechanical 13
-120,-120 to 120,-120 on Mechanical 13
120,120 to 120,-120 on Mechanical 13
-121,129.5 to -121,-130.5 on Mechanical 13